# Allegro board BRD30-00034-01.brd
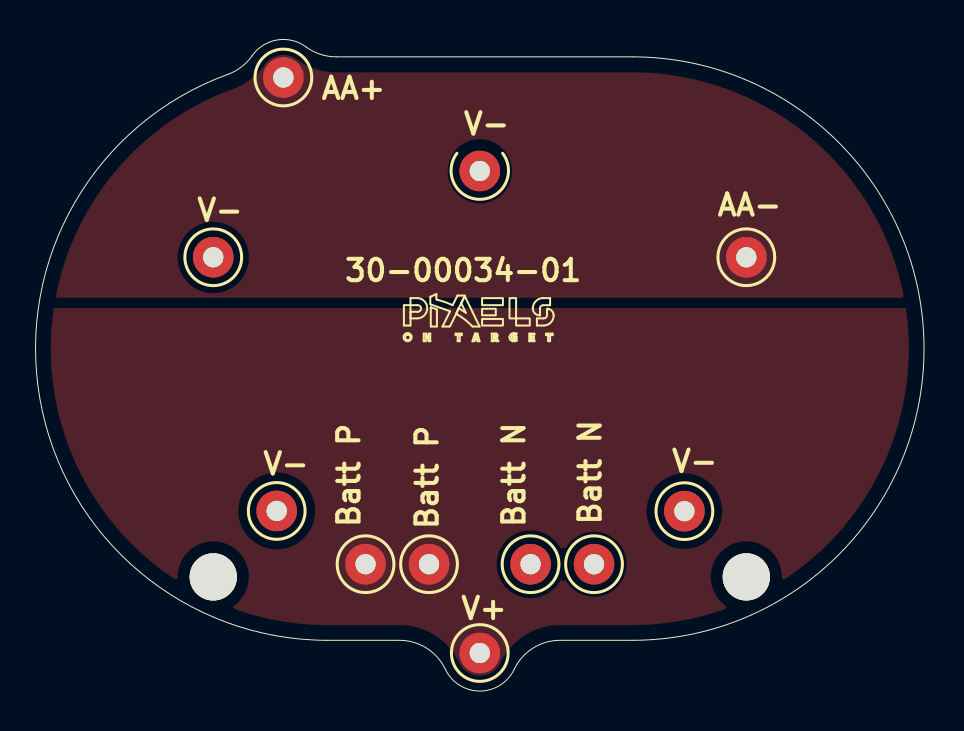
[diagram p0: board, top side]
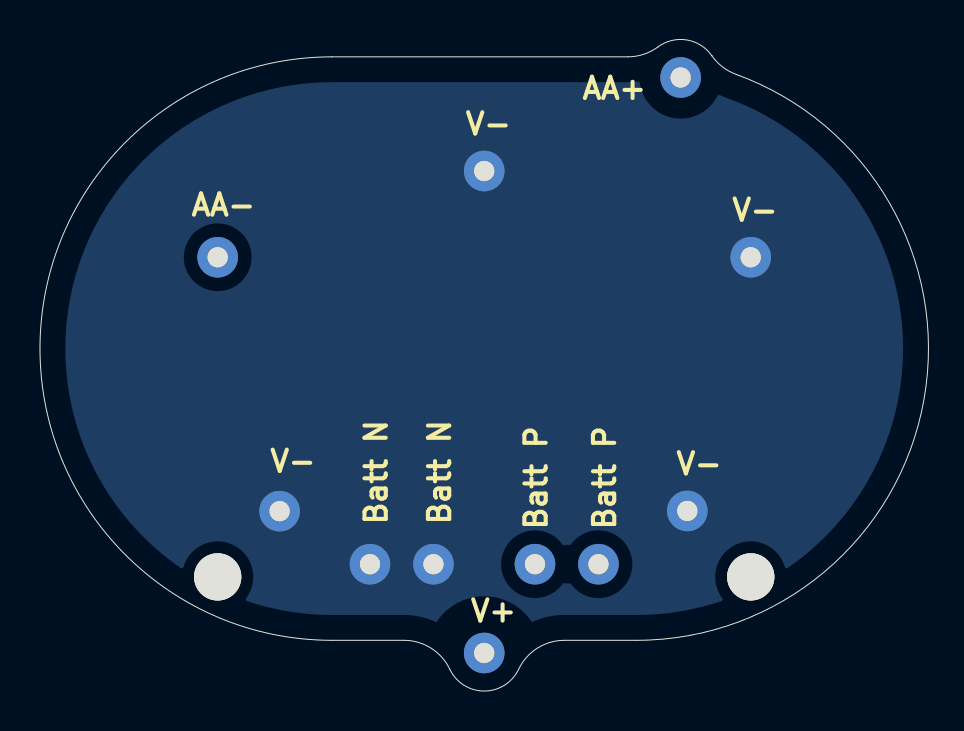
[diagram p1: board, bottom side, seen from below]

Outline 44.45 x 32.62 mm; copper layers: TOP, BOTTOM. Coordinates in mm from the lower left corner of the outline.
Outline path: 10.84,31.81 arc(10.3,31.25) 9.62,30.87 arc(0.22,14.61) 14.6,2.54 18.21,2.54 arc(19.57,2.15) 20.5,1.09 arc(22.22,0) 23.95,1.09 arc(24.88,2.15) 26.24,2.54 29.84,2.54 arc(44.45,17.15) 29.84,31.75 15.04,31.75 arc(14.25,31.88) 13.53,32.25 arc(12.09,32.6) 10.84,31.81

## Design rules (mm)
constraint set DEFAULT: min track width 0.127

## Placement (name value [footprint] x y rotation side)
MH1  Mechanical Hole_3.81MM  [MH_1MM]  12.4 30.72 0 top
MH2  Mechanical Hole_3.81MM  [MH_1MM]  35.56 21.72 0 top
MH3  Mechanical Hole_3.81MM  [MH_1MM]  22.22 26.04 0 top
MH4  Mechanical Hole_3.81MM  [MH_1MM]  8.89 21.72 0 top
MH5  Mechanical Hole_3.81MM  [MH_1MM]  12.06 9.02 0 top
MH6  Mechanical Hole_3.81MM  [MH_1MM]  32.46 9.01 0 top
MH7  Mechanical Hole_3.81MM  [MH_1MM]  22.22 1.91 0 top
MH8  Mechanical Hole_3.81MM  [MH_1MM]  24.76 6.35 0 top
MH9  Mechanical Hole_3.81MM  [MH_1MM]  16.51 6.35 0 top
MH10  Mechanical Hole_3.81MM  [MH_1MM]  19.68 6.35 0 top
MH11  Mechanical Hole_3.81MM  [MH_1MM]  27.94 6.35 0 top
NOREF  -  []  25.3 2.36 0 top
NOREF#2  -  []  0.03 16.12 0 top
NOREF#3  -  [unnamed#2]  8.89 5.72 0 top
NOREF#4  -  []  15.01 31.75 0 top
NOREF#5  -  [unnamed#2]  35.56 5.72 0 top
NOREF#6  -  []  21.9 0.03 0 top
NOREF#7  -  []  27.82 2.54 90 top

## Library data of the parts
MH1-MH11 = Mechanical Hole_3.81MM

## Footprints (pads in the part's own frame, mm; a bottom-side part is the same pattern mirrored in y, then rotated)
MH_1MM
  round 2.032 hole 1.016: 1(0,0)
unnamed#2
  round 2.362 hole 2.362 unplated: (0,0)

## Nets
AA+: MH1.1 MH2.1
V+: MH7.1 MH9.1 MH10.1
V-: MH3.1 MH4.1 MH5.1 MH6.1 MH8.1 MH11.1

## Copper pours and planes (outline as drawn; the poured copper is in the pictures)
V- on BOTTOM: 22.22,4.74 19.84,3.44 19.04,3.72 18.21,3.81 14.6,3.81 1.47,14.83 10.05,29.68 10.29,29.77 10.52,29.88 12.73,28.69 14.45,30.53 14.74,30.49 15.04,30.48 29.84,30.48 43.18,17.15 29.84,3.81 26.24,3.81 25.41,3.72 24.61,3.44 ; 2 cut-outs
AA+ on TOP: 0.98,19.57 4.02,26.05 9.88,30.14 10.6,30.51 11.2,31.03 11.23,31.03 11.46,31.36 12.21,31.83 13.08,31.62 14.01,31.14 15.04,30.98 29.84,30.98 38.73,27.75 43.47,19.57 ; 2 cut-outs
V+ on TOP: 26.24,3.3 24.48,2.79 23.26,1.42 22.22,0.76 21.19,1.42 19.97,2.79 18.21,3.3 14.6,3.3 4.13,8.1 0.91,19.16 0.93,19.18 43.54,19.18 40.33,8.1 29.84,3.3 ; 3 cut-outs

## Text on the board
BOTTOM: BOTTOM LAYER(L2)
Ref Des/Assembly Bottom: ASSEMBLY BOTTOM
Package Geometry/Pastemask Bottom: PASTEMASK BOTTOM
Ref Des/Silkscreen Bottom: V- | AA+ | V+ | SILKSCREEN BOTTOM | AA- | Batt P | Batt N
User.Comments: SOLDERMASK BOTTOM | SOLDERMASK TOP
TOP: TOP LAYER(L1)
Ref Des/Assembly Top: ASSEMBLY TOP
Package Geometry/Pastemask Top: PASTEMASK TOP
Ref Des/Silkscreen Top: V- | AA+ | 30-00034-01 | V+ | AA- | SILKSCREEN TOP | Batt P | Batt N
XSECTION_CHART: *  SURFACE - AIR 0 MM | *  DIELECTRIC - SOLDERMASK 0.02 MM | L1 TOP CONDUCTOR - COPPER 0.035 MM | *  DIELECTRIC - FR-4 1.5 MM | L2 BOTTOM CONDUCTOR - COPPER 0.035 MM | DESIGN CROSS SECTION CHART | ___________________________ | TOTAL THICKNESS 1.61 MM | 1-2
DIMENSION: X2 | X4
User.7: 4X | 1.150 | 1.109 | PLATED THRU HOLE | .925 | .755 | .575 | .255 | .150 | .125 | .025 | .062 | 0 | 11X | dia | .030 | R.075 | .525 | .400 | .387 | .300 | .225 | .100 | R.100 | .403 | 2X | .093 | R.575
User.8: 9.BOW AND TWIST NOT TO EXCEED 0.180MM (0.007") PER INCH AS MEASURED PER IPC-TM-650. | 1.FABRICATE PER IPC-6012B TYPE 2 CLASS 3 | 10.100%CONTINUITY TESTING USING DATABASE NETLIST SHALL BE PERFORMED. | 11.VENDOR SHOULD FOLLOW ROHS COMPLAINT PROCESS FOR MANUFACTURING. | 2.MATERIAL: | 3.BOARD THICKNESS: 1.6 MM +/-5% TOL. | 4.FINISHED CU THICKNESS FOR ALL LAYERS : 2 OZ. | 8.SILKSCREEN:SINGLE SIDE WITH PERMANENT NON CONDUCTIVE WHITE EPOXY INK | 5.NO OF LAYERS: 2 | 6.SURFACE FINISH: ENIG FINISH | 7.SOLDERMASK CLEARANCE IS GIVEN SAME AS PAD SIZE EXCEPT FIDUCIALS. | SILKSCREEN MAY BE TRIMMED OFF ANY SOLDERED ENTITY. | COLOR:GREEN | NOTES: (UNLESS OTHERWISE SPECIFIED) | BASE MATERIAL  : FR4 Tg 180 | VENDOR SHALL MODIFY THE MASK CLEARANCE AS PER THE REQUIRED MANUFACTURING TOLERANCE | BOARD DIMENSION ARE IN MM
User.10: FIGURE | FINISHED_SIZE | 40.0 | 93.0 | DRILL CHART: TOP to BOTTOM | ALL UNITS ARE IN MILS | TOLERANCE_DRILL | +3.0/-3.0 | PLATED | NON-PLATED | QTY | 11 | 2
